# Altium PCB PCB1.PcbDoc
Units mm, origin at the board's own origin, x right, y up, seen from the top; angles counter-clockwise.
Board outline 152.4 x 101.6 mm, 2 copper layers (Top Layer, Bottom Layer), stack 1.98 mm thick; 24 components, 13 nets, 70 pads, 2 vias.
Unrouted connection lines stored in the file: 1.
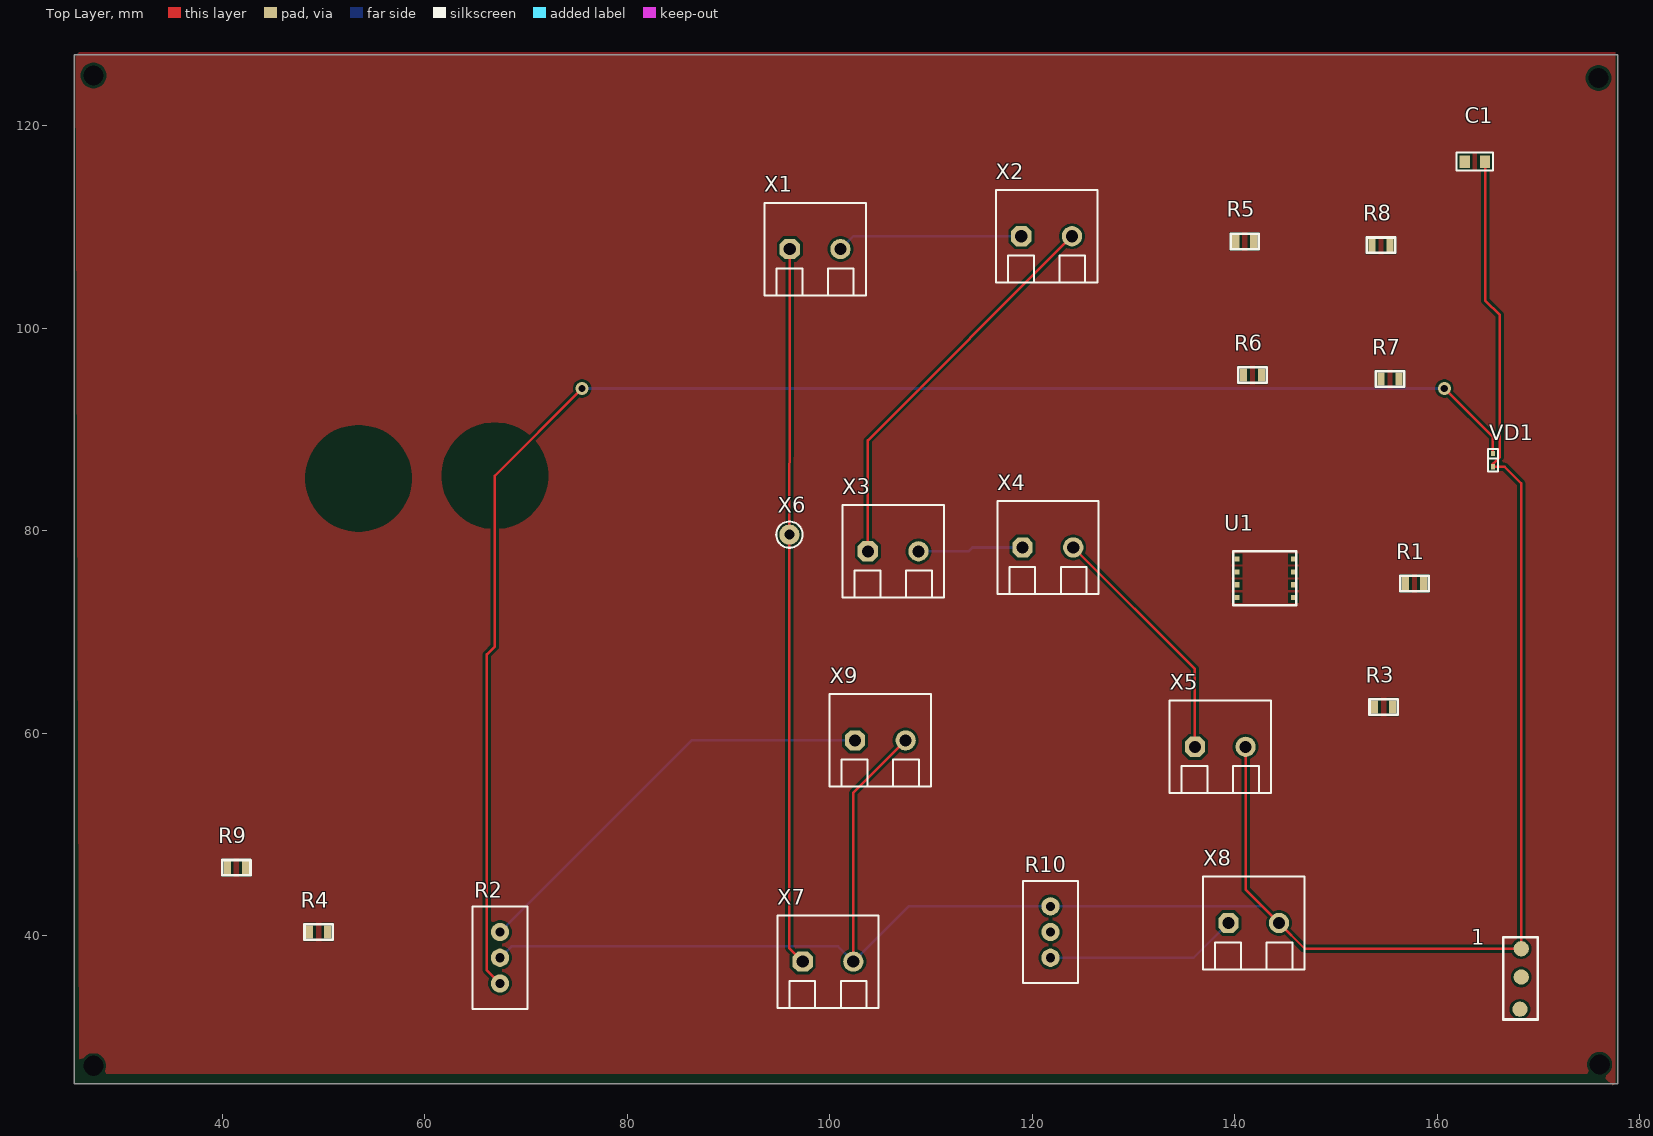
[diagram p0: Top Layer view]
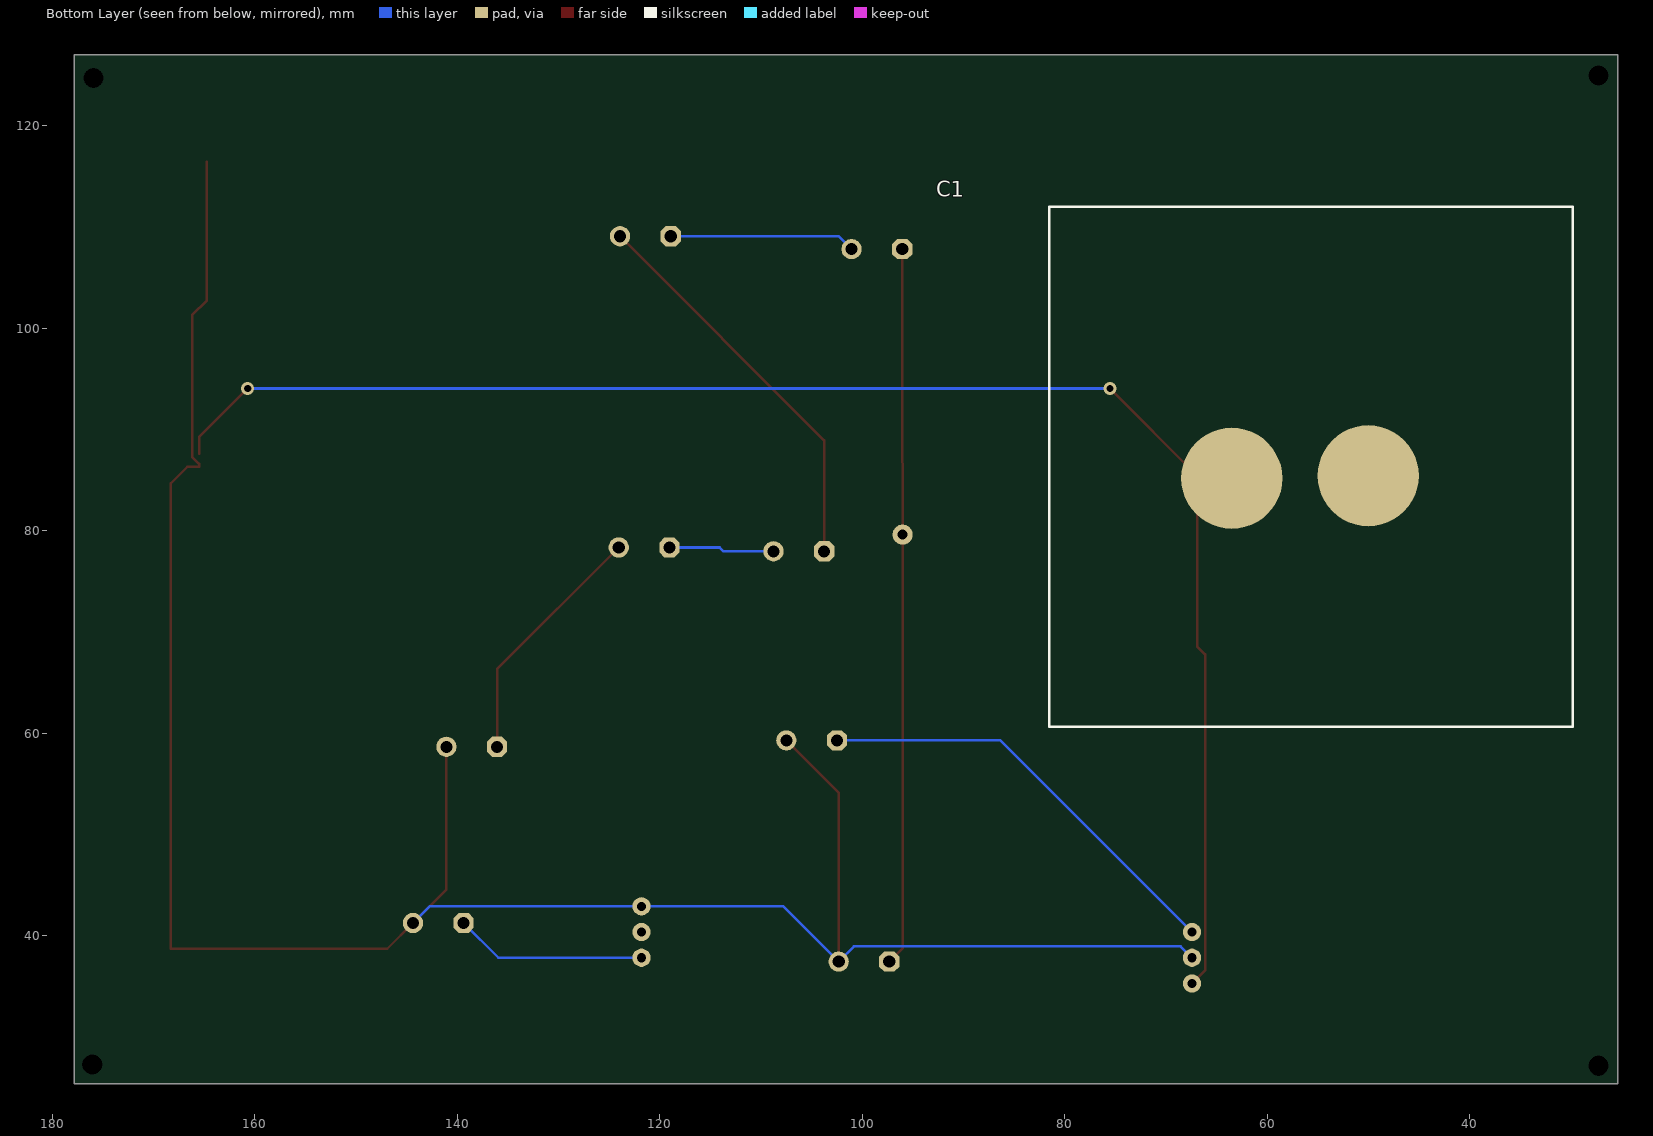
[diagram p1: Bottom Layer view, seen from below]
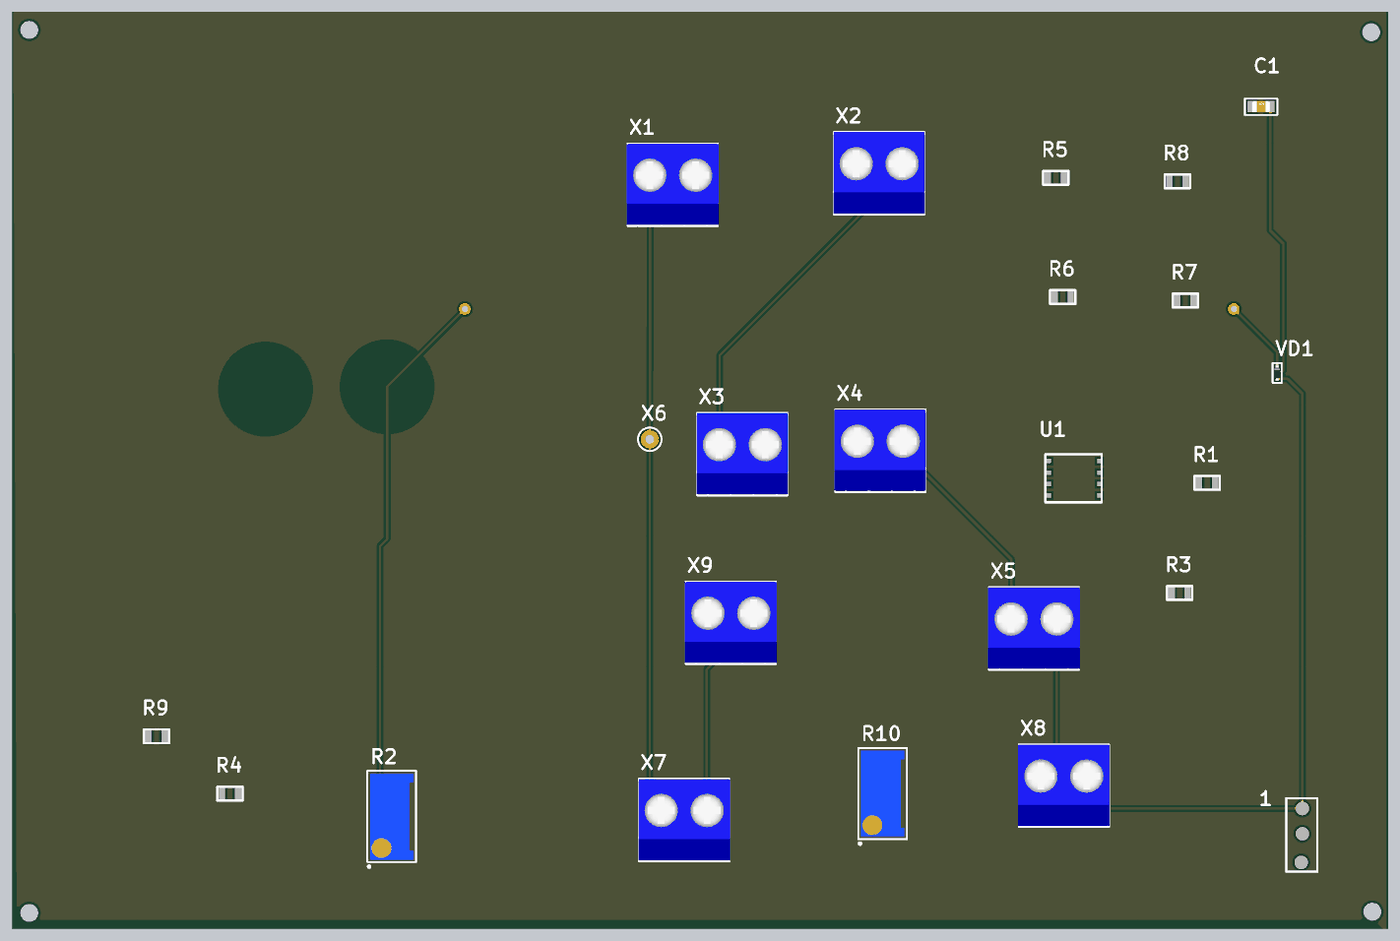
[diagram p2: 3D render of the assembled board from above, using the file's embedded part models]

## Layer stack, top to bottom
Top Solder: solder mask 0.0102, Solder Resist, Dk 3.5
Top Layer: signal copper 0.0356
Dielectric 1: dielectric 1.909, FR-4, Dk 4.8
Bottom Layer: signal copper 0.0356
Bottom Solder: solder mask 0.0102, Solder Resist, Dk 3.5

## Board outline
25.4,25.4 177.8,25.4 177.8,127 25.4,127

## Design rules (kind name [scope] priority, off if disabled: settings)
Clearance [All] p1: gap=0.254 ignorepadtopadclearanceinfootprint=FALSE
PolygonConnect [All] p1: connectstyle=Relief reliefconductorwidth=0.254 reliefentries=4 polygonreliefangle="90 Angle" airgapwidth=0.254
RoomDefinition Э3 [InComponentClass('Э3')] p1: confinementstyle=ConfineIn formatcopy=TRUE lockcomponents=FALSE outline 195.961,4.445 448.437,4.445 448.437,175.006 195.961,175.006
RoutingVias [All] p1: holewidth=0.711 width=1.27 viastyle="Through Hole" minholewidth=0.711 minwidth=1.27 maxholewidth=0.711 maxwidth=1.27
SolderMaskExpansion [All] p1: expansion=0.102
Width [All] p1: maxlimit=0.254 minlimit=0.254 preferedwidth=0.254
30 further rules are at their usual default settings.

## Components (designator, comment, footprint, x,y, rotation, side; value= is the part's Value field where it differs from the comment)
1 "BD139" transistor 169.799,28.575 r0 top
C1 "*" CH0805C 163.703,116.459 r0 top
R1 "10 КОМ-5%-0805" "Resistor SMD 0805" 160.655,74.422 r0 top
R2 "*" "RES: 3296W" 67.437,35.306 r90 top
R3 "10 КОМ-5%-0805" "Resistor SMD 0805" 157.607,62.23 r0 top
R4 "10 КОМ-5%-0805" "Resistor SMD 0805" 52.451,40.005 r0 top
R5 "10 КОМ-5%-0805" "Resistor SMD 0805" 143.891,108.204 r0 top
R6 "10 КОМ-5%-0805" "Resistor SMD 0805" 144.653,94.996 r0 top
R7 "10 КОМ-5%-0805" "Resistor SMD 0805" 158.242,94.615 r0 top
R8 "10 КОМ-5%-0805" "Resistor SMD 0805" 157.353,107.823 r0 top
R9 "10 КОМ-5%-0805" "Resistor SMD 0805" 44.323,46.355 r0 top
R10 "*" "RES: 3296W" 121.793,37.846 r90 top
U1 "5218L" "PCBComponent_1 - duplicate4" 136.779,73.406 r0 top
VD1 "*" SOD523 165.481,86.33 r90 top
X1 "*" "CON: 300-02P-5.0" 98.552,107.823 r0 top
X2 "*" "CON: 300-02P-5.0" 121.412,109.093 r0 top
X3 "*" "CON: 300-02P-5.0" 106.259,77.978 r0 top
X4 "*" "CON: 300-02P-5.0" 121.539,78.359 r0 top
X5 "*" "CON: 300-02P-5.0" 138.557,58.674 r0 top
X6 "*" "CON: PADS 1x1mm" 96.012,79.629 r0 top
X7 "*" "CON: 300-02P-5.0" 99.822,37.465 r0 top
X8 "*" "CON: 300-02P-5.0" 141.859,41.275 r0 top
X9 "*" "CON: 300-02P-5.0" 104.989,59.309 r0 top
С1 "condensator" "PCBComponent_1 - duplicate2" 59.055,84.806 r180 bottom

## Footprints (in the part's own frame and the unit in brackets; to place one, negate y for a bottom-side part, rotate by r counter-clockwise, add the part's x,y. Pads: shape width x height; smd on the part's side, far side on the other; paste and mask are expansions set on the pad)
CH0805C [mm] "Chip Capacitor, 2-Leads, Body 2,00x1,20mm, IPC Medium Density"
  rect 1x1.25 smd: 1(-1,0) 2(1,0)
  silkscreen extent -1.8,-0.9 1.8,0.9, body extent -1,-0.62 1,0.63, height 0.78
"CON: 300-02P-5.0" [mm] "2 pin 5.08mm screw connector"
  oct 2x2 hole 1.2: 1(-2.5,0)
  round 2 hole 1.2: 2(2.5,0)
  round 0.5 on Mech1: 13(-4.4,-3.9)
  silkscreen extent -5,-4.57 5,4.57, body extent -5.08,-4.44 5.08,4.56, height 12.5
"CON: PADS 1x1mm" [mm]
  round 2 hole 1: 1(0,0)
  silkscreen extent -1.3,-1.3 1.3,1.3
"PCBComponent_1 - duplicate2" [mm]
  round 10 smd: 1(-4.445,0.381) 2(9.017,0.635)
  silkscreen extent -22.48,-24.13 29.21,27.18, body extent -22.17,-24.09 28.83,26.88
"PCBComponent_1 - duplicate4" [mm]
  rect 0.5x0.5 smd: 1(3.429,3.81) 2(3.429,2.54) 3(3.429,1.27) 4(3.429,0) 5(9.017,3.81) 6(9.017,2.54) 7(9.017,1.27) 8(9.017,0)
  silkscreen extent 3.05,-0.76 9.27,4.57, body extent 3.34,-0.7 9.14,4.5
"RES: 3296W" [mm]
  round 1.8 hole 0.9: 1(0,0) 2(2.54,0) 3(5.08,0)
  round 0.5 on Top Overlay: 4(-3,2.5)
  silkscreen extent -2.5,-2.7 7.6,2.7, body extent -2.22,-2.4 7.31,2.4, height 11.55
"Resistor SMD 0805" [mm]
  rect 0.7x1.3 smd: 0(-3.81,0.381) 1(-2.032,0.381)
  silkscreen extent -4.32,-0.38 -1.52,1.14, body extent -3.92,-0.22 -1.92,0.98, height 0.61
SOD523 [mm]
  rect 0.5x0.4 smd: 1(0,0) 2(1.3,0)
  silkscreen extent -0.45,-0.5 1.75,0.5, body extent -0.17,-0.4 1.48,0.4, height 0.65
transistor [mm]
  round 1.5 smd: 1(-1.651,4.191) 2(-1.524,7.366) 3(-1.524,10.16)
  silkscreen extent -3.3,3.17 0.13,11.3, body extent -2.9,3.21 0,11.01

## Part data
1: library part transistor
C1: library part Capacitor
R1 R3 R4 R5 R6 R7 R8 R9: library part resistor_SMD0805
R2 R10: library part "ADJ resistor"
U1: library part operasion_ysil
VD1: library part TVS-diod
X1 X2 X3 X4 X5 X7 X8 X9: library part 2-Connector
X6: library part 1-Connector
С1: library part condensator+, "220000UF 20% 100V", manufacture="Nichicon Corp.", partnamber=LNR2A224MSE, Href=https://www.chipdip.ru/product0/8005615214?from=suggest_product

## Free pads (board coordinates)
  oval 2x0 hole 2 unplated: 2(27.305,27.178) 2(27.305,124.968) 2(175.895,124.714) 2(176.022,27.305)

## Via types
v1: diameter 1.27, hole 0.711, Top Layer to Bottom Layer, 2 vias

## Nets (pads, with @x,y where several pads share a name; then routed paths per layer and width w, separated by ;. In a path a pad name is that pad's centre, name@x,y a point inside that pad or via, vN(x,y) a via of type N, cw(c..) or ccw(c..) an arc to the next point about the centre after c; other vN are vias at no path point)
GND: 1.3 C1.2 R2.2 R10.3 VD1.1 X5.2 X7.2 X8.2 X9.2 | length 229.1
  Top Layer w0.254: X7.2 102.322,54.142 X9.2 ; X5.2 141.057,44.577 X8.2 146.899,38.735 1.3 168.275,84.679 166.624,86.33 VD1.1 165.481,86.614 166.167,87.3 166.167,101.305 164.703,102.768 C1.2
  Bottom Layer w0.254: R2.2 68.555,38.964 100.823,38.964 X7.2 107.783,42.926 R10.3 142.708,42.926 X8.2
Net1_4: C1.1
NetR1_2: R2.1 VD1.2 С1.2 | length 156.7
  Top Layer w0.254: R2.1 66.142,36.601 66.142,67.793 66.929,68.58 66.929,85.441 v1(75.544,94.056) ; v1(160.68,94.056) 165.481,89.256 VD1.2
  Bottom Layer w0.254: v1(75.544,94.056) v1(160.68,94.056)
NetR1_3: X1.1 X6.1 X7.1 | length 70.9
  Top Layer w0.254: X1.1 96.052,93.766 X6.1 96.012,38.775 X7.1
NetR2_3: R2.3 X9.1 | length 42.9
  Bottom Layer w0.254: R2.3 86.36,59.309 X9.1
NetR3_3: R10.1 X8.1 | length 19
  Bottom Layer w0.254: R10.1 135.93,37.846 X8.1
NetR4_2: U1.1
NetR5_3: 
NetR6_2: U1.2
NetX1_2: X1.2 X2.1 | length 18.4
  Bottom Layer w0.254: X1.2 102.322,109.093 X2.1
NetX2_2: X2.2 X3.1 | length 39.5
  Top Layer w0.254: X3.1 103.759,88.94 X2.2
NetX3_2: X3.2 X4.1 | length 10.4
  Bottom Layer w0.254: X3.2 113.69,77.978 114.071,78.359 X4.1
NetX4_2: X4.2 X5.1 | length 24.7
  Top Layer w0.254: X4.2 136.057,66.341 X5.1
pads on no net: 1.1 1.2 R1.0 R1.1 R2.4 R3.0 R3.1 R4.0 R4.1 R5.0 R5.1 R6.0 R6.1 R7.0 R7.1 R8.0 R8.1 R9.0 R9.1 R10.2 R10.4 U1.3 U1.4 U1.5 U1.6 U1.7 U1.8 X1.13 X2.13 X3.13 X4.13 X5.13 X7.13 X8.13 X9.13 С1.1

## Polygon pours and split planes (outlines as drawn)
no net on Top Layer "NONET_L01_P000" (solid, pour order 0): 25.527,126.873 25.908,127.254 177.546,127.254 177.546,25.019 176.149,26.416 25.908,26.416